# Altium PCB WorldClock.PcbDoc (part 1 of 13)
Units mil, origin at the board's own origin, x right, y up, seen from the top; angles counter-clockwise.
Board outline 3700 x 3850 mil, 2 copper layers (Top Layer, Bottom Layer); 227 components, 134 nets, 1324 pads, 248 vias.
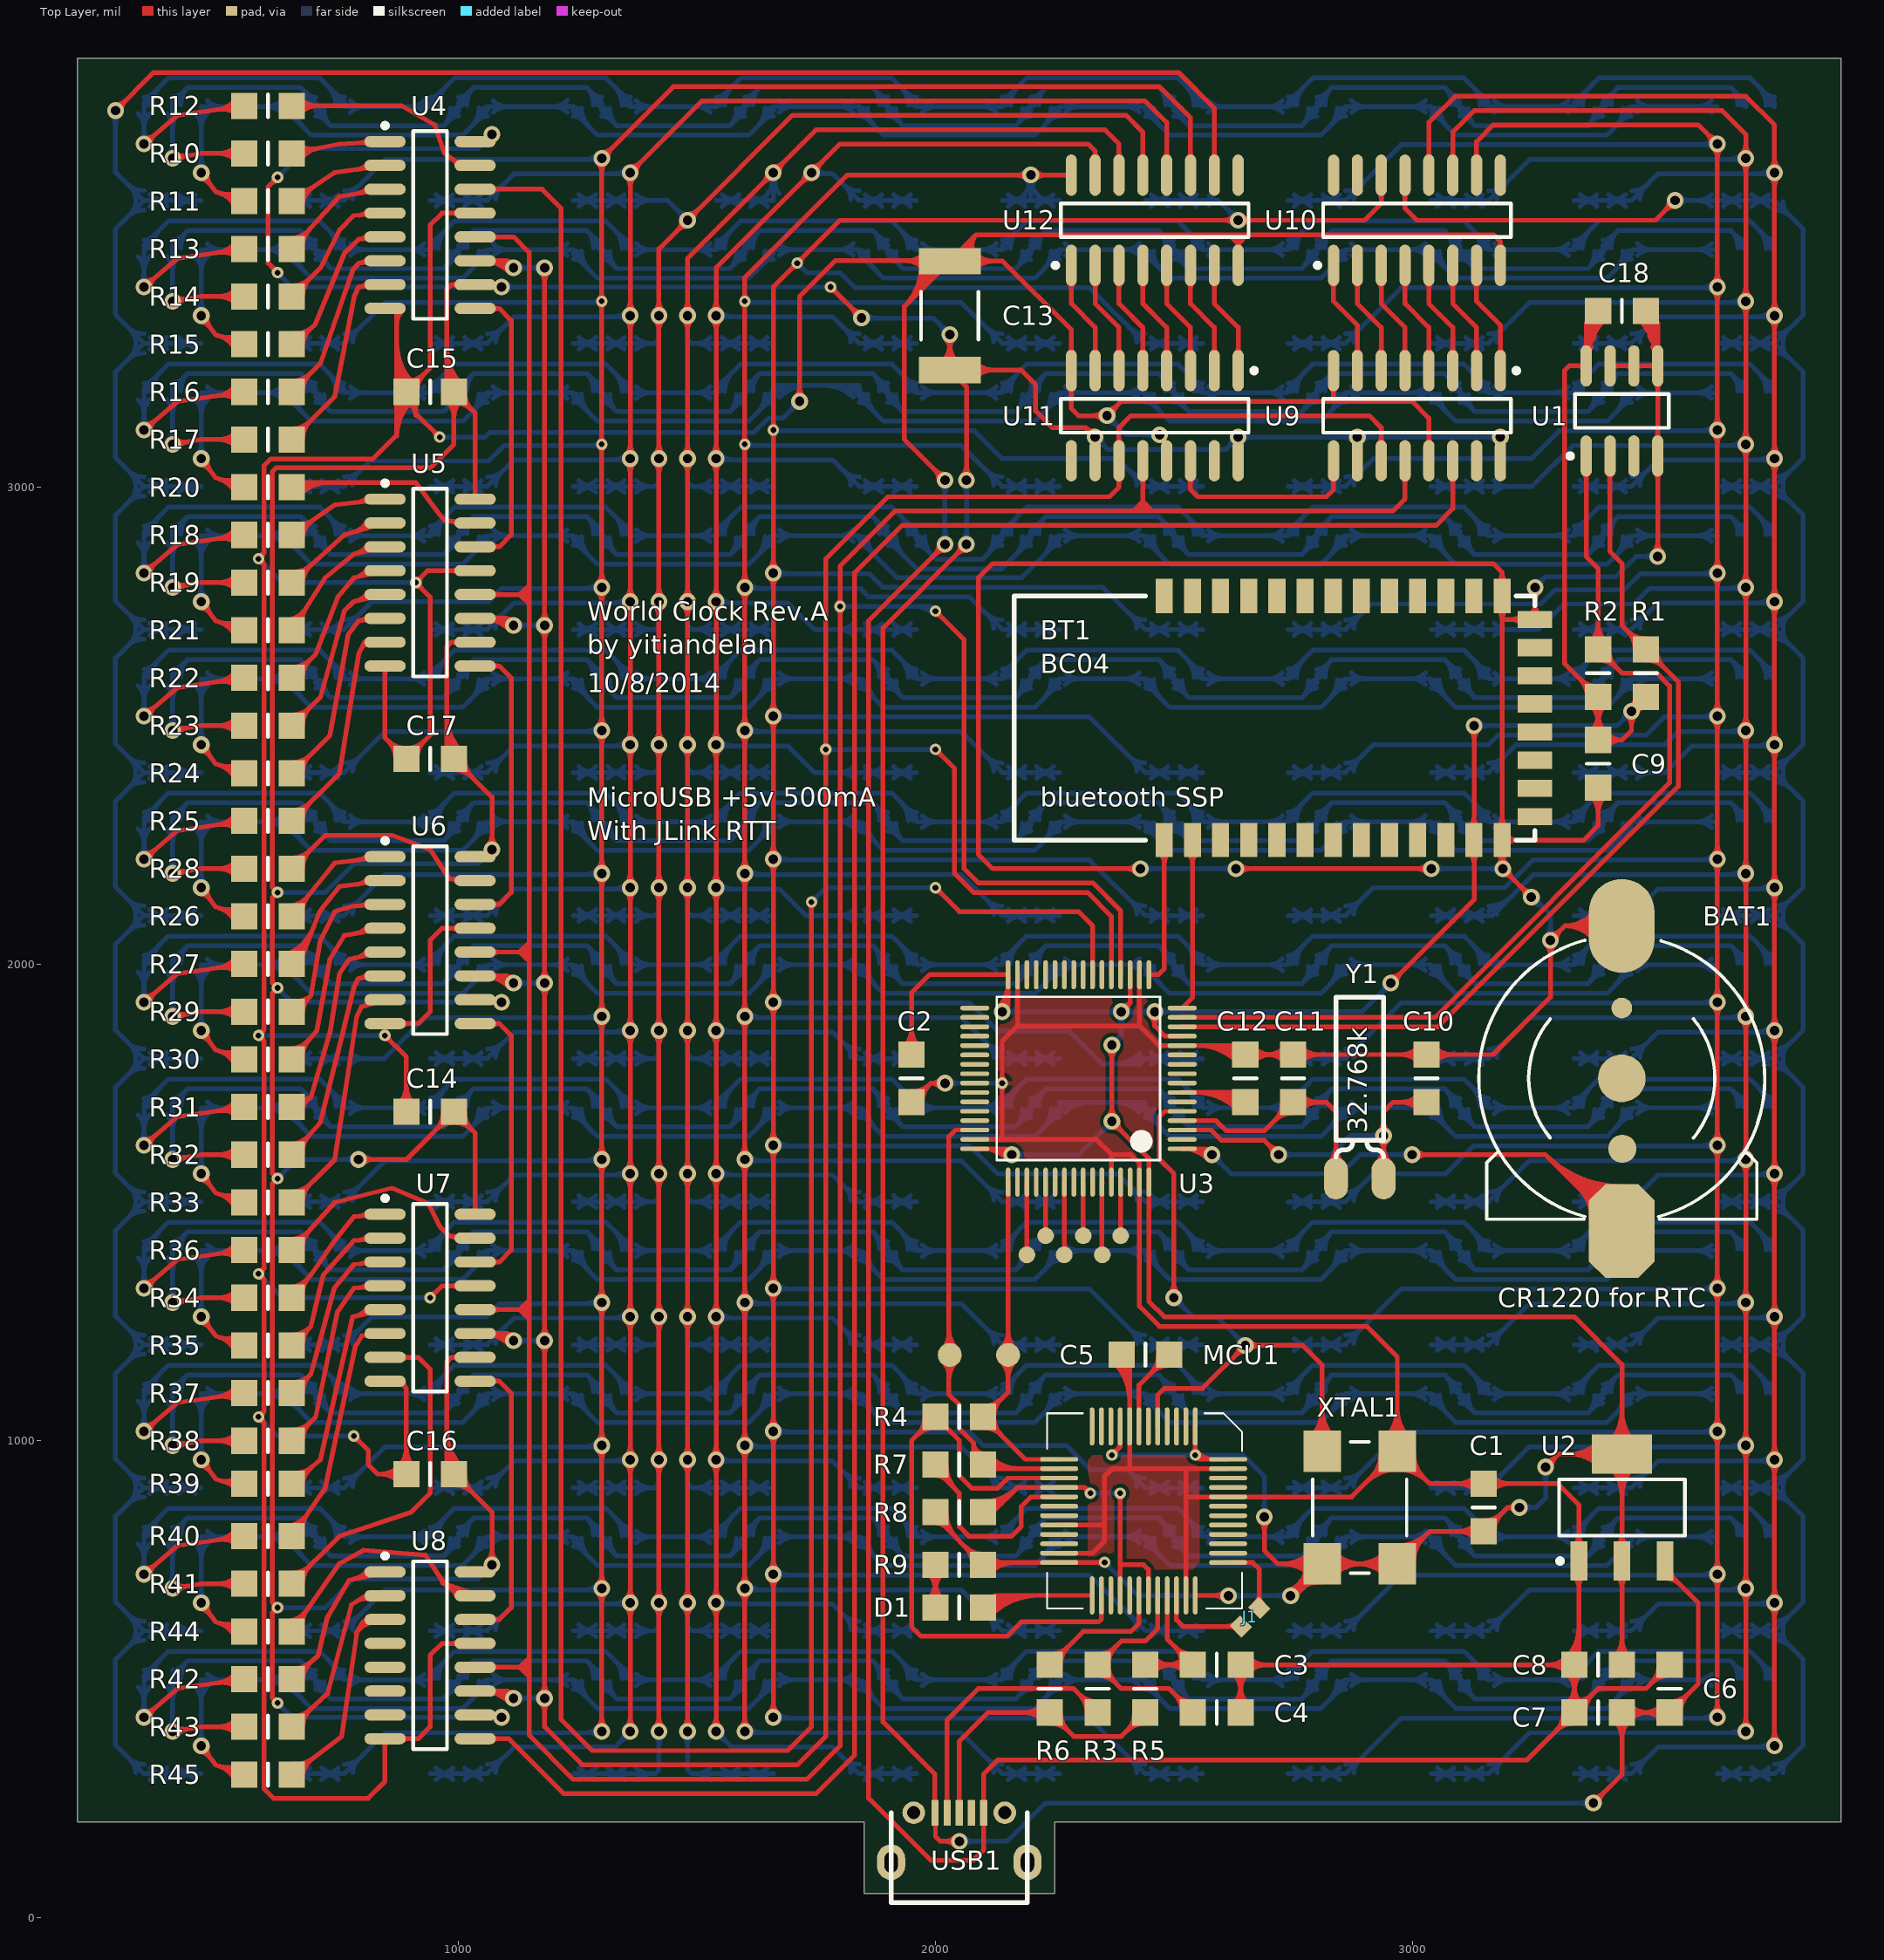
[diagram p0: Top Layer view]
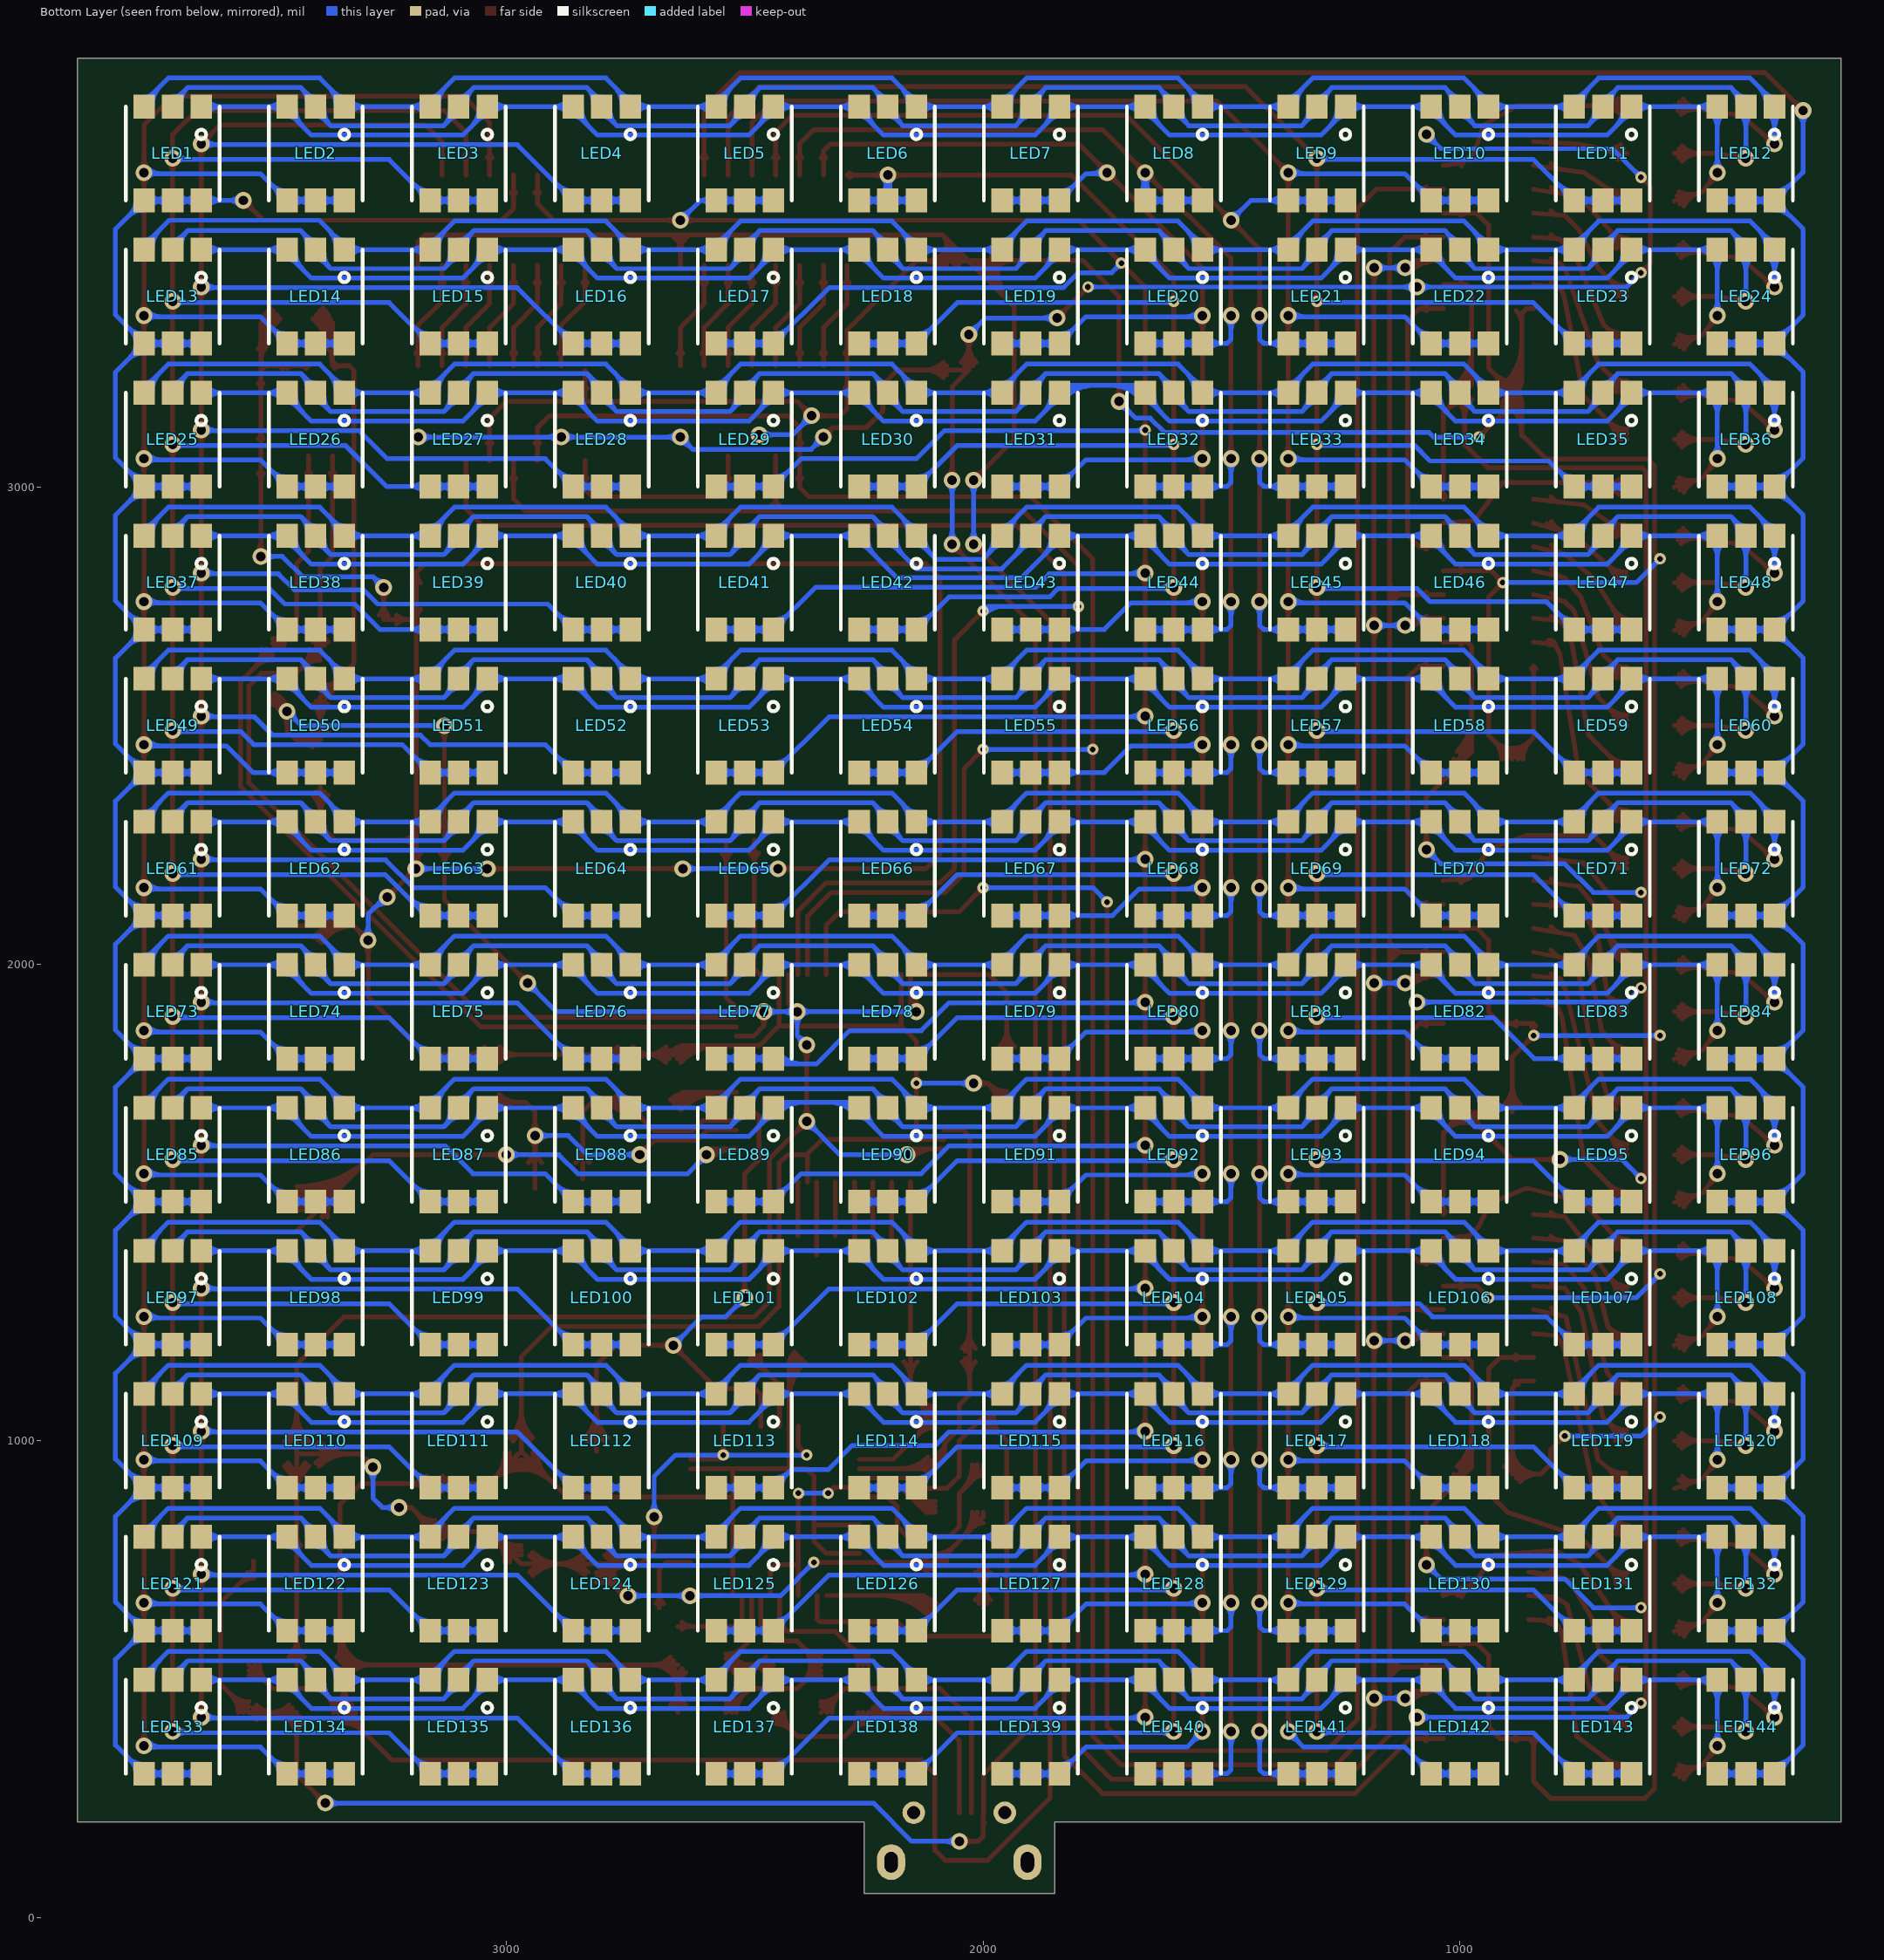
[diagram p1: Bottom Layer view, seen from below]

## Layer stack, top to bottom
Top Solder: solder mask 0.4, Solder Resist, Dk 3.5
Top Layer: signal copper 1.4
Dielectric 1: dielectric 12.6, FR-4, Dk 4.8
Bottom Layer: signal copper 1.4
Bottom Solder: solder mask 0.4, Solder Resist, Dk 3.5

## Board outline
200,200 1850,200 1850,50 2250,50 2250,200 3900,200 3900,3900 200,3900

## Design rules (kind name [scope] priority, off if disabled: settings)
Clearance [All] p1: gap=8
PolygonConnect [All] p1: connectstyle=Relief reliefconductorwidth=10 reliefentries=4 polygonreliefangle="90 Angle" airgapwidth=10
RoutingVias [All] p1: holewidth=28 width=50 viastyle="Through Hole" minholewidth=28 minwidth=50 maxholewidth=28 maxwidth=50
SolderMaskExpansion [All] p1: expansion=4
Width [All] p1: maxlimit=20 minlimit=10 preferedwidth=10 minimp=50.000000 maximp=50.000000 favimp=50.000000
29 further rules are at their usual default settings.

## Classes and differential pairs
component class 单片机: BAT1 BT1 XTAL1
component class 仿真器: SWD USB1

## Components (designator, comment, footprint, x,y, rotation, side; value= is the part's Value field where it differs from the comment)
BAT1 "CR1220" BAT-CR1220 3440,1440 r0 top
BT1 "BC04" BC04 2480,2260 r90 top
C1 "100nF" 0805 3150,860 r270 top
C2 "100nF" 0805 1950,1760 r90 top
C3 "22pF" 0805 2590,530 r180 top
C4 "22pF" 0805 2590,430 r180 top
C5 "100nF" 0805 2440.28,1180.37 r180 top
C6 "10uF" 0805 3540,480 r90 top
C7 "100nF" 0805 3390,430 r0 top
C8 "10uF" 0805 3390,530 r180 top
C9 "100nF" 0805 3390,2420 r90 top
C10 "10pF" 0805 3030,1760 r270 top
C11 "10pF" 0805 2750,1760 r270 top
C12 "100nF" 0805 2650,1760 r90 top
C13 "100uF" 2512 2030,3360 r90 top
C14 "10uF" 0805 940,1690 r180 top
C15 "10uF" 0805 940,3200 r180 top
C16 "10uF" 0805 940,930 r180 top
C17 "10uF" 0805 940,2430 r180 top
C18 "100nF" 0805 3440,3370 r180 top
D1 "LED0" 0805 2050,650 r0 top
J1 "CON2" 0603 2660,630 r225 top
LED1 "RGBLED" 5050 3700,3700 r270 bottom
LED2 "RGBLED" 5050 3400,3700 r270 bottom
LED3 "RGBLED" 5050 3100,3700 r270 bottom
LED4 "RGBLED" 5050 2800,3700 r270 bottom
LED5 "RGBLED" 5050 2500,3700 r270 bottom
LED6 "RGBLED" 5050 2200,3700 r270 bottom
LED7 "RGBLED" 5050 1900,3700 r270 bottom
LED8 "RGBLED" 5050 1600,3700 r270 bottom
LED9 "RGBLED" 5050 1300,3700 r270 bottom
LED10 "RGBLED" 5050 1000,3700 r270 bottom
LED11 "RGBLED" 5050 700,3700 r270 bottom
LED12 "RGBLED" 5050 400,3700 r270 bottom
LED13 "RGBLED" 5050 3700,3400 r270 bottom
LED14 "RGBLED" 5050 3400,3400 r270 bottom
LED15 "RGBLED" 5050 3100,3400 r270 bottom
LED16 "RGBLED" 5050 2800,3400 r270 bottom
LED17 "RGBLED" 5050 2500,3400 r270 bottom
LED18 "RGBLED" 5050 2200,3400 r270 bottom
LED19 "RGBLED" 5050 1900,3400 r270 bottom
LED20 "RGBLED" 5050 1600,3400 r270 bottom
LED21 "RGBLED" 5050 1300,3400 r270 bottom
LED22 "RGBLED" 5050 1000,3400 r270 bottom
LED23 "RGBLED" 5050 700,3400 r270 bottom
LED24 "RGBLED" 5050 400,3400 r270 bottom
LED25 "RGBLED" 5050 3700,3100 r270 bottom
LED26 "RGBLED" 5050 3400,3100 r270 bottom
LED27 "RGBLED" 5050 3100,3100 r270 bottom
LED28 "RGBLED" 5050 2800,3100 r270 bottom
LED29 "RGBLED" 5050 2500,3100 r270 bottom
LED30 "RGBLED" 5050 2200,3100 r270 bottom
LED31 "RGBLED" 5050 1900,3100 r270 bottom
LED32 "RGBLED" 5050 1600,3100 r270 bottom
LED33 "RGBLED" 5050 1300,3100 r270 bottom
LED34 "RGBLED" 5050 1000,3100 r270 bottom
LED35 "RGBLED" 5050 700,3100 r270 bottom
LED36 "RGBLED" 5050 400,3100 r270 bottom
LED37 "RGBLED" 5050 3700,2800 r270 bottom
LED38 "RGBLED" 5050 3400,2800 r270 bottom
LED39 "RGBLED" 5050 3100,2800 r270 bottom
LED40 "RGBLED" 5050 2800,2800 r270 bottom
LED41 "RGBLED" 5050 2500,2800 r270 bottom
LED42 "RGBLED" 5050 2200,2800 r270 bottom
LED43 "RGBLED" 5050 1900,2800 r270 bottom
LED44 "RGBLED" 5050 1600,2800 r270 bottom
LED45 "RGBLED" 5050 1300,2800 r270 bottom
LED46 "RGBLED" 5050 1000,2800 r270 bottom
LED47 "RGBLED" 5050 700,2800 r270 bottom
LED48 "RGBLED" 5050 400,2800 r270 bottom
LED49 "RGBLED" 5050 3700,2500 r270 bottom
LED50 "RGBLED" 5050 3400,2500 r270 bottom
LED51 "RGBLED" 5050 3100,2500 r270 bottom
LED52 "RGBLED" 5050 2800,2500 r270 bottom
LED53 "RGBLED" 5050 2500,2500 r270 bottom
LED54 "RGBLED" 5050 2200,2500 r270 bottom
LED55 "RGBLED" 5050 1900,2500 r270 bottom
LED56 "RGBLED" 5050 1600,2500 r270 bottom
LED57 "RGBLED" 5050 1300,2500 r270 bottom
LED58 "RGBLED" 5050 1000,2500 r270 bottom
LED59 "RGBLED" 5050 700,2500 r270 bottom
LED60 "RGBLED" 5050 400,2500 r270 bottom
LED61 "RGBLED" 5050 3700,2200 r270 bottom
LED62 "RGBLED" 5050 3400,2200 r270 bottom
LED63 "RGBLED" 5050 3100,2200 r270 bottom
LED64 "RGBLED" 5050 2800,2200 r270 bottom
LED65 "RGBLED" 5050 2500,2200 r270 bottom
LED66 "RGBLED" 5050 2200,2200 r270 bottom
LED67 "RGBLED" 5050 1900,2200 r270 bottom
LED68 "RGBLED" 5050 1600,2200 r270 bottom
LED69 "RGBLED" 5050 1300,2200 r270 bottom
LED70 "RGBLED" 5050 1000,2200 r270 bottom
LED71 "RGBLED" 5050 700,2200 r270 bottom
LED72 "RGBLED" 5050 400,2200 r270 bottom
LED73 "RGBLED" 5050 3700,1900 r270 bottom
LED74 "RGBLED" 5050 3400,1900 r270 bottom
LED75 "RGBLED" 5050 3100,1900 r270 bottom
LED76 "RGBLED" 5050 2800,1900 r270 bottom
LED77 "RGBLED" 5050 2500,1900 r270 bottom
LED78 "RGBLED" 5050 2200,1900 r270 bottom
LED79 "RGBLED" 5050 1900,1900 r270 bottom
LED80 "RGBLED" 5050 1600,1900 r270 bottom
LED81 "RGBLED" 5050 1300,1900 r270 bottom
LED82 "RGBLED" 5050 1000,1900 r270 bottom
LED83 "RGBLED" 5050 700,1900 r270 bottom
LED84 "RGBLED" 5050 400,1900 r270 bottom
LED85 "RGBLED" 5050 3700,1600 r270 bottom
LED86 "RGBLED" 5050 3400,1600 r270 bottom
LED87 "RGBLED" 5050 3100,1600 r270 bottom
LED88 "RGBLED" 5050 2800,1600 r270 bottom
LED89 "RGBLED" 5050 2500,1600 r270 bottom
LED90 "RGBLED" 5050 2200,1600 r270 bottom
LED91 "RGBLED" 5050 1900,1600 r270 bottom
LED92 "RGBLED" 5050 1600,1600 r270 bottom
LED93 "RGBLED" 5050 1300,1600 r270 bottom
LED94 "RGBLED" 5050 1000,1600 r270 bottom
LED95 "RGBLED" 5050 700,1600 r270 bottom
LED96 "RGBLED" 5050 400,1600 r270 bottom
LED97 "RGBLED" 5050 3700,1300 r270 bottom
LED98 "RGBLED" 5050 3400,1300 r270 bottom
LED99 "RGBLED" 5050 3100,1300 r270 bottom
LED100 "RGBLED" 5050 2800,1300 r270 bottom
LED101 "RGBLED" 5050 2500,1300 r270 bottom
LED102 "RGBLED" 5050 2200,1300 r270 bottom
LED103 "RGBLED" 5050 1900,1300 r270 bottom
LED104 "RGBLED" 5050 1600,1300 r270 bottom
LED105 "RGBLED" 5050 1300,1300 r270 bottom
LED106 "RGBLED" 5050 1000,1300 r270 bottom
LED107 "RGBLED" 5050 700,1300 r270 bottom
LED108 "RGBLED" 5050 400,1300 r270 bottom
LED109 "RGBLED" 5050 3700,1000 r270 bottom
LED110 "RGBLED" 5050 3400,1000 r270 bottom
LED111 "RGBLED" 5050 3100,1000 r270 bottom
LED112 "RGBLED" 5050 2800,1000 r270 bottom
LED113 "RGBLED" 5050 2500,1000 r270 bottom
LED114 "RGBLED" 5050 2200,1000 r270 bottom
LED115 "RGBLED" 5050 1900,1000 r270 bottom
LED116 "RGBLED" 5050 1600,1000 r270 bottom
LED117 "RGBLED" 5050 1300,1000 r270 bottom
LED118 "RGBLED" 5050 1000,1000 r270 bottom
LED119 "RGBLED" 5050 700,1000 r270 bottom
LED120 "RGBLED" 5050 400,1000 r270 bottom
LED121 "RGBLED" 5050 3700,700 r270 bottom
LED122 "RGBLED" 5050 3400,700 r270 bottom
LED123 "RGBLED" 5050 3100,700 r270 bottom
LED124 "RGBLED" 5050 2800,700 r270 bottom
LED125 "RGBLED" 5050 2500,700 r270 bottom
LED126 "RGBLED" 5050 2200,700 r270 bottom
LED127 "RGBLED" 5050 1900,700 r270 bottom
LED128 "RGBLED" 5050 1600,700 r270 bottom
LED129 "RGBLED" 5050 1300,700 r270 bottom
LED130 "RGBLED" 5050 1000,700 r270 bottom
LED131 "RGBLED" 5050 700,700 r270 bottom
LED132 "RGBLED" 5050 400,700 r270 bottom
LED133 "RGBLED" 5050 3700,400 r270 bottom
LED134 "RGBLED" 5050 3400,400 r270 bottom
LED135 "RGBLED" 5050 3100,400 r270 bottom
LED136 "RGBLED" 5050 2800,400 r270 bottom
LED137 "RGBLED" 5050 2500,400 r270 bottom
LED138 "RGBLED" 5050 2200,400 r270 bottom
LED139 "RGBLED" 5050 1900,400 r270 bottom
LED140 "RGBLED" 5050 1600,400 r270 bottom
LED141 "RGBLED" 5050 1300,400 r270 bottom
LED142 "RGBLED" 5050 1000,400 r270 bottom
LED143 "RGBLED" 5050 700,400 r270 bottom
LED144 "RGBLED" 5050 400,400 r270 bottom
MCU1 "STM32F103C8T6" LQLFP48 2230,1060 r270 top
R1 "10k" 0805 3490,2610 r90 top
R2 "10k" 0805 3390,2610 r90 top
R3 "22" 0805 2340,480 r90 top
R4 "100" 0805 2050,1050.23 r180 top
R5 "22" 0805 2440,480 r90 top
R6 "1.5K" 0805 2240,480 r90 top
R7 "100" 0805 2050,950 r180 top
R8 "10k" 0805 2050,850 r180 top
R9 "1k" 0805 2050,740 r0 top
R10 "120" 0805 600,3700 r0 top
R11 "120" 0805 600,3600 r0 top
R12 "120" 0805 600,3800 r180 top
R13 "120" 0805 600,3500 r0 top
R14 "120" 0805 600,3400 r0 top
R15 "120" 0805 600,3300 r0 top
R16 "120" 0805 600,3200 r0 top
R17 "120" 0805 600,3100 r0 top
R18 "120" 0805 600,2900 r0 top
R19 "120" 0805 600,2800 r0 top
R20 "120" 0805 600,3000 r180 top
R21 "120" 0805 600,2700 r0 top
R22 "120" 0805 600,2600 r0 top
R23 "120" 0805 600,2500 r0 top
R24 "120" 0805 600,2400 r0 top
R25 "120" 0805 600,2300 r0 top
R26 "120" 0805 600,2100 r0 top
R27 "120" 0805 600,2000 r0 top
R28 "120" 0805 600,2200 r180 top
R29 "120" 0805 600,1900 r0 top
R30 "120" 0805 600,1800 r0 top
R31 "120" 0805 600,1700 r0 top
R32 "120" 0805 600,1600 r0 top
R33 "120" 0805 600,1500 r0 top
R34 "120" 0805 600,1300 r0 top
R35 "120" 0805 600,1200 r0 top
R36 "120" 0805 600,1400 r180 top
R37 "120" 0805 600,1100 r0 top
R38 "120" 0805 600,1000 r0 top
R39 "120" 0805 600,910 r0 top
R40 "120" 0805 600,800 r0 top
R41 "120" 0805 600,700 r0 top
R42 "120" 0805 600,500 r0 top
R43 "120" 0805 600,400 r0 top
R44 "120" 0805 600,600 r180 top
R45 "120" 0805 600,300 r0 top
U1 "LM75" SO8_N 3440,3160 r90 top
U2 "LM1117" SOT223_L 3440,860 r90 top
U3 "STM32F103RBT6" LQFP-64 2470,1590 r180 top
U4 "74HC595" SO-16_N 940,3550 r0 top
U5 "74HC595" SO-16_N 940,2800 r0 top
U6 "74HC595" SO-16_N 940,2050 r0 top
U7 "74HC595" SO-16_N 940,1300 r0 top
U8 "74HC595" SO-16_N 940,550 r0 top
U9 "74HC595" SO-16_N 3010,3150 r270 top
U10 "ULN2003" SO-16_N 3010,3560 r90 top
U11 "74HC595" SO-16_N 2460,3150 r270 top
U12 "ULN2003" SO-16_N 2460,3560 r90 top
USB1 "USB_mini" USB-MICRO 2050,220 r180 top
XTAL1 "XTAL" XTAL7050 2890,860 r90 top
Y1 "XTAL" XTAL-32768 2840,1550 r0 top

## Footprints (in the part's own frame and the unit in brackets; to place one, negate y for a bottom-side part, rotate by r counter-clockwise, add the part's x,y. Pads: shape width x height; smd on the part's side, far side on the other; paste and mask are expansions set on the pad)
0603 [mm] "Chip Capacitor, Body 1.6x0.8mm, IPC High Density"
  rect 0.8x0.9 smd: 1(-0.7,0) 2(0.7,0)
  body extent -0.87,-0.47 0.87,0.47, height 1.3
0805 [mil] "Chip Resistor, Body 2.0x1.2mm, IPC Medium Density"
  rect 55x55 smd: 1(-50,0) 2(50,0)
  Top Layer pour cut-out: -20,30 20,30 20,-30 -20,-30
  silkscreen extent 0,-24 0,24, body extent -40,-28 40,28, height 28
2512 [mm] "Chip Capacitor, Body 2.54x1.27mm, IPC High Density"
  rect 1.4x3.3 smd: 1(-2.9,0) 2(2.9,0)
  silkscreen extent -1.27,-1.52 1.27,1.52, body extent -3.05,-1.7 3.05,1.7, height 1.4
5050 [mil]
  rect 50x45 smd: 1(-98.43,60) 2(-98.43,0) 3(-98.43,-60) 4(98.43,-60) 5(98.43,0) 6(98.43,60)
  silkscreen extent -98,-98 98,98, body extent -100,-100 100,100, height 47
BAT-CR1220 [mm]
  round 2.54 smd: 0(-0.01,8.13)
  round 1.1 smd: 0(-0.01,11.88)
  round 1.5 smd: 0(0.015,4.38)
  oct 3.5x5 smd: 1(-0.01,0.002)
  oval 3.5x5 smd: 2(-0.01,16.258)
  silkscreen extent -7.63,0.63 7.61,15.49
BC04 [mil]
  rect 72x36 smd: 1(0,0) 2(0,-59.06) 3(0,-118.11) 4(0,-177.17) 5(0,-236.22) 6(0,-295.28) 7(0,-354.33) 8(0,-413.39) 9(0,-472.44) 10(0,-531.5) 11(0,-590.55) 12(0,-649.61) 13(0,-708.66) 22(511.81,-708.66) 23(511.81,-649.61) 24(511.81,-590.55) 25(511.81,-531.5) 26(511.81,-472.44) 27(511.81,-413.39) 28(511.81,-354.33) 29(511.81,-295.28) 30(511.81,-236.22) 31(511.81,-177.17) 32(511.81,-118.11) 33(511.81,-59.06) 34(511.81,0)
  rect 36x72 smd: 14(49.21,-777.56) 15(108.27,-777.56) 16(167.32,-777.56) 17(226.38,-777.56) 18(285.43,-777.56) 19(344.49,-777.56) 20(403.54,-777.56) 21(462.6,-777.56)
  silkscreen extent 0,-778 512,315
LQFP-64 [mm]
  oval 1.55x0.25 smd: 1(-1.207,-0.568) 2(-1.207,-1.068) 3(-1.207,-1.568) 4(-1.207,-2.068) 5(-1.207,-2.568) 6(-1.207,-3.068) 7(-1.207,-3.568) 8(-1.207,-4.068) 9(-1.207,-4.568) 10(-1.207,-5.068) 11(-1.207,-5.568) 12(-1.207,-6.068) 13(-1.207,-6.568) 14(-1.207,-7.068) 15(-1.207,-7.568) 16(-1.207,-8.068) 33(9.843,-8.068) 34(9.843,-7.568) 35(9.843,-7.068) 36(9.843,-6.568) 37(9.843,-6.068) 38(9.843,-5.568) 39(9.843,-5.068) 40(9.843,-4.568) 41(9.843,-4.068) 42(9.843,-3.568) 43(9.843,-3.068) 44(9.843,-2.568) 45(9.843,-2.068) 46(9.843,-1.568) 47(9.843,-1.068) 48(9.843,-0.568)
  oval 0.25x1.55 smd: 17(0.568,-9.843) 18(1.068,-9.843) 19(1.568,-9.843) 20(2.068,-9.843) 21(2.568,-9.843) 22(3.068,-9.843) 23(3.568,-9.843) 24(4.068,-9.843) 25(4.568,-9.843) 26(5.068,-9.843) 27(5.568,-9.843) 28(6.068,-9.843) 29(6.568,-9.843) 30(7.068,-9.843) 31(7.568,-9.843) 32(8.068,-9.843) 49(8.068,1.207) 50(7.568,1.207) 51(7.068,1.207) 52(6.568,1.207) 53(6.068,1.207) 54(5.568,1.207) 55(5.068,1.207) 56(4.568,1.207) 57(4.068,1.207) 58(3.568,1.207) 59(3.068,1.207) 60(2.568,1.207) 61(2.068,1.207) 62(1.568,1.207) 63(1.068,1.207) 64(0.568,1.207)
  silkscreen extent -0.03,-8.67 8.67,0.03, body extent -0.68,-9.32 9.32,0.68, height 1.6
LQLFP48 [mil] "STC"
  oval 80x10 smd: 1(30,315) 2(30,295.31) 3(30,275.63) 4(30,255.94) 5(30,236.26) 6(30,216.57) 7(30,196.89) 8(30,177.2) 9(30,157.52) 10(30,137.83) 11(30,118.15) 12(30,98.46) 25(384.33,98.46) 26(384.33,118.15) 27(384.33,137.83) 28(384.33,157.52) 29(384.33,177.2) 30(384.33,196.89) 31(384.33,216.57) 32(384.33,236.26) 33(384.33,255.94) 34(384.33,275.63) 35(384.33,295.31) 36(384.33,315)
  oval 10x80 smd: 13(98.9,29.57) 14(118.58,29.57) 15(138.27,29.57) 16(157.95,29.57) 17(177.64,29.57) 18(197.32,29.57) 19(217.01,29.57) 20(236.69,29.57) 21(256.38,29.57) 22(276.06,29.57) 23(295.75,29.57) 24(315.43,29.57) 37(315.43,383.9) 38(295.75,383.9) 39(276.06,383.9) 40(256.38,383.9) 41(236.69,383.9) 42(217.01,383.9) 43(197.32,383.9) 44(177.64,383.9) 45(157.95,383.9) 46(138.27,383.9) 47(118.58,383.9) 48(98.9,383.9)
  silkscreen extent 2,4 412,413, body extent 58,57 358,357, height 60
SO8_N [mm] "SOIC, 8-Leads, Body 4.9x3.9mm, Pitch 1.27mm, IPC Medium Density"
  oval 2.2x0.6 smd: 1(-2.4,1.905) 2(-2.4,0.635) 3(-2.4,-0.635) 4(-2.4,-1.905) 5(2.4,-1.905) 6(2.4,-0.635) 7(2.4,0.635) 8(2.4,1.905)
  silkscreen extent -2.52,-2.5 0.9,2.88, body extent -2,-2.5 2,2.5, height 1.75
SO-16_N [mm] "SOIC, 16-Leads, Body 9.9x3.9mm, Pitch 1.27mm, IPC Medium Density"
  oval 2.2x0.6 smd: 1(-2.4,4.445) 2(-2.4,3.175) 3(-2.4,1.905) 4(-2.4,0.635) 5(-2.4,-0.635) 6(-2.4,-1.905) 7(-2.4,-3.175) 8(-2.4,-4.445) 9(2.4,-4.445) 10(2.4,-3.175) 11(2.4,-1.905) 12(2.4,-0.635) 13(2.4,0.635) 14(2.4,1.905) 15(2.4,3.175) 16(2.4,4.445)
  silkscreen extent -2.52,-5 0.9,5.42, body extent -2,-5 2,5, height 1.75
SOT223_L [mm] "SOT223, 4-Leads, Body 6.5x3.5mm, Pitch 2.3mm, Lead Span 7mm, IPC High Density"
  rect 2.1x0.9 smd: 1(-2.85,2.3) 2(-2.85,0) 3(-2.85,-2.3)
  rect 2.1x3.2 smd: 4(2.85,0)
  silkscreen extent -2.97,-3.35 1.5,3.42, body extent -1.85,-3.35 1.85,3.35, height 1.7
USB-MICRO [mil]
  rect 15x54 smd: 1(51,0) 2(25.5,0) 3(0,0) 4(-25.5,0) 5(-51,0)
  oval 59.06x74.8 hole 27.56 slot 43.31 at 90 deg: 6(-143,104) 6(143,104)
  round 47.24 hole 27.5: 6(-95.5,0) 6(95.5,0)
  silkscreen extent -143,0 143,189
XTAL7050 [mm]
  rect 2.2x2 smd: 1(-3,-2) 2(3,-2) 3(3,2) 4(-3,2)
  silkscreen extent -3.5,-2.5 3.5,2.5
XTAL-32768 [mil]
  oval 50x88 smd: 1(0,0) 2(100,0)
  silkscreen extent 0,45 100,380, body extent -18,-28 118,396, height 126

## Part data
BAT1: library part Battery, "Multicell Battery"
C1 C2 C3 C4 C5 C6 C7 C8 C9 C10 C11 C12 C13 C14 C15 C16 C17 C18: library part Cap, "Capacitor"
D1: "Typical INFRARED GaAs LED"
J1 USB1: "Connector"
MCU1: "STM32 ARM-based 32-bit MCU Performance Line with 64 kB Flash, 20 kB Internal RAM, -40 to +85癈 Temperature, 48-Pin LQFP, Tray"
R1 R2 R3 R4 R5 R6 R7 R8 R9 R10 R11 R12 R13 R14 R15 R16 R17 R18 R19 R20 R21 R22 R23 R24 R25 R26 R27 R28 R29 R30 R31 R32 R33 R34 R35 R36 R37 R38 R39 R40 R41 R42 R43 R44 R45: library part Res2, "Resistor"
U2: "正三端稳压器"
U3: "STM32 ARM-based 32-bit MCU Performance Line with 128 kB Flash, 20 kB Internal RAM, -40 to +85癈 Temperature, 64-Pin LQFP, Tray"
XTAL1: library part XTAL_SMD
Y1: "Crystal Oscillator"

## Free pads (board coordinates)
  round 50 smd: 0(2030,1180) 0(2152.36,1180)
  round 35 smd: 0(2191.73,1390) 0(2231.1,1430) 0(2270,1390) 0(2310,1430) 0(2350,1390) 0(2388.58,1430)

## Via types
v1: diameter 35, hole 20, Top Layer to Bottom Layer, tented both sides, 213 vias
v2: diameter 24, hole 12, Top Layer to Bottom Layer, tented both sides, 35 vias

## Nets (pads, with @x,y where several pads share a name; then routed paths per layer and width w, separated by ;. In a path a pad name is that pad's centre, name@x,y a point inside that pad or via, vN(x,y) a via of type N, cw(c..) or ccw(c..) an arc to the next point about the centre after c; other vN are vias at no path point)
3V3: BT1.12 C1.2 C2.2 C8.1 C9.2 C18.2 MCU1.1 MCU1.9 MCU1.24 MCU1.36 MCU1.48 R1.1 R2.1 R8.2 R9.2 U1.8 U2.2 U2.4 U3.13 U3.19 U3.32 U3.48 U3.64 XTAL1.1 XTAL1.4 | length 14947.2
  Top Layer w10: C2.2@1934.09,1825.91 ccw(c1895.68,1864.32) 1950,1864.32 ccw(c2004.32,1864.32) C2.2@1965.91,1825.91 ; C2.2@1941.16,1818.84 ccw(c1919.82,1840.18) 1950,1840.18 ccw(c1980.18,1840.18) C2.2@1958.84,1818.84 ; C2.2@1950,1810 1950,1940 1987.52,1977.52 U3.32@2152.36,1977.52 2152.36,1912.36 v1(2140,1900) ; R8.2@2000,827.5 cw(c2000,797.32) 2021.34,818.66 ; R8.2@2000,850 2000,840 R9.2@2100,740 2104.57,744.57 MCU1.24@2259.57,744.57 2354.57,744.57 v2(2355,745) ; R8.2@2012.5,850 ccw(c2066.82,850) 2028.41,811.59 ; R8.2@2022.5,850 ccw(c2100.96,850) 2045.48,794.52 ; R9.2@2077.5,740 ccw(c2023.18,740) 2061.59,778.41 ccw(c2100,816.82) R9.2@2100,762.5 ; U3.48@2082.48,1612.36 2147.64,1612.36 v1(2160,1600) ; R9.2@2087.5,740 ccw(c2057.32,740) 2078.66,761.34 ccw(c2100,782.68) R9.2@2100,752.5 ; U3.48@2099.98,1612.36 cw(c2099.98,1539.98) v1@2151.16,1591.16 ; R9.2@2108.84,731.16 cw(c2141.2,698.8) 2141.2,744.57 ; R9.2@2115.91,724.09 cw(c2165.35,674.65) 2165.35,744.57 ; R9.2@2115.91,755.91 ccw(c2143.29,783.29) 2143.29,744.57 ; 2124.12,1612.36 cw(c2124.12,1564.12) v1@2158.23,1598.23 ; v1@2131.16,1908.84 ccw(c2079.98,1960.02) U3.32@2152.36,1960.02 ; v1@2138.23,1901.77 ccw(c2104.12,1935.88) 2152.36,1935.88 ; 2337.05,744.57 ccw(c2337.05,762.95) v2@2350.05,749.95 ; 2339.15,744.57 cw(c2339.15,729.15) v2@2350.05,740.05 ; v1@2361.16,1678.84 ccw(c2339.82,1700.18) 2370,1700.18 ccw(c2400.18,1700.18) v1@2378.84,1678.84 ; v1@2361.16,1821.16 cw(c2339.82,1799.82) 2370,1799.82 cw(c2400.18,1799.82) v1@2378.84,1821.16 ; v2(2370,970) 2387.52,987.52 MCU1.9@2387.52,1030 ; v2@2370,977 ccw(c2370,993.9) 2381.95,981.95 ccw(c2393.9,970) v2@2377,970 ; v1@2370,1657.5 cw(c2370,1627.32) 2391.34,1648.66 cw(c2412.68,1670) v1@2382.5,1670 ; v1(2370,1830) v1(2370,1670) 2447.64,1592.36 U3.64@2447.64,1542.48 2447.64,1292.36 2480,1260 3340,1260 3440,1160 U2.4@3440,972.2 ; 2382.23,982.23 ccw(c2369.46,995) MCU1.9@2387.52,995 ; v1(2390,1900) 2408.27,1918.27 ; v1@2391.45,1912.42 ccw(c2393.81,1932.72) 2408.27,1918.27 ; v1@2402.42,1901.45 cw(c2422.72,1903.81) 2408.27,1918.27 ; U3.19@2408.27,1977.52 2408.27,1918.27 ; v1@2451.2,1891.12 cw(c2430.25,1870) 2460,1870 ; v1(2460,1900) 2460,1870 ; v1@2468.8,1891.12 ccw(c2489.75,1870) 2460,1870 ; U3.13@2517.52,1848.58 2481.42,1848.58 2460,1870 ; v2@2540.05,974.95 ccw(c2528.1,986.9) 2545,986.9 ccw(c2561.9,986.9) 2549.95,974.95 ccw(c2583.38,1008.38) MCU1.48@2583.38,961.1 ; v2@2542.88,967.88 ccw(c2559.24,984.24) 2559.24,961.1 ; MCU1.36@2545,675.67 2614.33,675.67 v1(2615,675) ; MCU1.1@2545,1030 v2(2545,970) 2553.9,961.1 ; v2@2546.6,963.18 cw(c2548.38,955.58) 2553.9,961.1 ; v2@2551.82,968.4 ccw(c2559.42,966.62) 2553.9,961.1 ; 2583.21,675.67 cw(c2583.21,643.21) v1@2606.16,666.16 ; 2586.44,675.67 ccw(c2586.44,703.56) v1@2606.16,683.84 ; MCU1.48@2613.9,961.1 2553.9,961.1 ; v1@2681.16,831.16 cw(c2659.82,809.82) 2690,809.82 cw(c2720.18,809.82) v1@2698.84,831.16 ; v1(2690,840) 2690,770 2718.11,741.89 XTAL1.4@2811.26,741.89 ; v1@2741.76,687.07 ccw(c2730.88,727.7) 2767.3,706.67 ; v1(2745,675) 2745,675.63 XTAL1.4@2811.26,741.89 ; v1@2745,687.5 ccw(c2745,716.16) 2765.26,695.89 ; v1@2745.87,676.5 cw(c2811.26,611.1) XTAL1.4@2811.26,703.58 ; v1@2748.24,687.07 ccw(c2755.28,713.38) 2768.9,689.79 ; v1@2755.37,686 ccw(c2703.42,737.95) XTAL1.4@2776.89,737.95 ; v1@2757.07,671.76 cw(c2789.07,663.19) 2772.51,691.88 ; v1@2757.07,678.24 cw(c2774.74,682.97) 2758.9,692.12 ; v1@2757.5,675 cw(c2789.2,675) 2766.78,697.41 ; 2762.94,693.57 cw(c2811.26,645.24) XTAL1.4@2811.26,713.58 ; XTAL1.4@2772.44,703.07 ccw(c2737.56,737.95) XTAL1.4@2786.89,737.95 ; XTAL1.4@2780.01,710.64 cw(c2811.26,679.39) XTAL1.4@2811.26,723.58 ; XTAL1.4@2786.96,717.59 ccw(c2728.28,658.91) 2728.28,741.89 ccw(c2728.28,824.87) XTAL1.4@2786.96,766.19 ; XTAL1.4@2794.03,724.66 ccw(c2752.43,683.06) 2752.43,741.89 ccw(c2752.43,800.72) XTAL1.4@2794.03,759.12 ; XTAL1.4@2828.49,724.66 cw(c2870.09,683.06) 2870.09,741.89 cw(c2870.09,800.72) XTAL1.4@2828.49,759.12 ; XTAL1.4@2835.56,717.59 cw(c2894.24,658.91) 2894.24,741.89 cw(c2894.24,824.87) XTAL1.4@2835.56,766.19 ; XTAL1.1@2944.44,717.59 ccw(c2885.76,658.91) 2885.76,741.89 ccw(c2885.76,824.87) XTAL1.1@2944.44,766.19 ; XTAL1.1@2951.51,724.66 ccw(c2909.91,683.06) 2909.91,741.89 ccw(c2909.91,800.72) XTAL1.1@2951.51,759.12 ; v1(2955,1960) 3130,2135 v1(3130,2500) ; v1@2955,1972.5 ccw(c2955,2002.68) 2976.34,1981.34 ccw(c2997.68,1960) v1@2967.5,1960 ; XTAL1.1@2968.74,760.2 ccw(c2968.74,804.39) XTAL1.1@2999.99,773.14 ; XTAL1.1@2968.74,770.2 ccw(c2968.74,838.54) 3017.06,790.21 ; XTAL1.1@2968.74,780.2 ccw(c2968.74,872.68) 3034.13,807.28 ; XTAL1.1@2993.11,745.83 cw(c3042.44,745.83) XTAL1.1@3007.56,780.71 ; XTAL1.1@3003.11,745.83 cw(c3076.58,745.83) 3024.63,797.78 ; BT1.12@3120.41,2232.81 cw(c3097.27,2209.66) 3130,2209.66 ; BT1.12@3120.41,2287.19 ccw(c3097.27,2310.34) 3130,2310.34 ; v1@3121.16,2491.16 cw(c3099.82,2469.82) 3130,2469.82 cw(c3160.18,2469.82) v1@3138.84,2491.16 ; 3130,2211.57 cw(c3160.04,2211.57) BT1.12@3138.8,2232.81 ; 3130,2308.43 ccw(c3160.04,2308.43) BT1.12@3138.8,2287.19 ; C1.2@3134.09,794.09 ccw(c3095.68,755.68) 3095.68,810 ccw(c3095.68,864.32) C1.2@3134.09,825.91 ; C1.2@3141.16,801.16 ccw(c3119.82,779.82) 3119.82,810 ccw(c3119.82,840.18) C1.2@3141.16,818.84 ; C1.2@3150,822.5 ccw(c3150,852.68) 3171.34,831.34 ccw(c3192.68,810) C1.2@3162.5,810 ; C1.2@3150,832.5 ccw(c3150,886.82) 3188.41,848.41 ccw(c3226.82,810) C1.2@3172.5,810 ; v1@3215,852.5 ccw(c3200,841.25) 3200,860 ; v1@3215,867.5 cw(c3200,878.75) 3200,860 ; v1(3225,860) 3200,860 ; v1(3280,945) 3307.2,972.2 U2.4@3440,972.2 ; v1@3280,957.5 ccw(c3280,987.68) 3301.34,966.34 ccw(c3322.68,945) v1@3292.5,945 ; U1.8@3360.18,3249.67 ccw(c3348.56,3238.05) 3348.56,3254.49 ccw(c3348.56,3270.93) U1.8@3360.18,3259.3 ; U1.8@3360.18,3290.8 ccw(c3348.56,3302.43) 3365,3302.43 ccw(c3381.44,3302.43) U1.8@3369.82,3290.8 ; U1.8@3361.3,3291.7 ccw(c3349.83,3309.42) 3370.47,3305 ; U1.8@3361.59,3291.88 ccw(c3339.83,3329.59) 3381.88,3318.32 ; U1.8@3365,3255.32 cw(c3504.68,3255.32) C18.2@3405.91,3354.09 ; U1.8@3365,3279.47 cw(c3480.53,3279.47) C18.2@3398.84,3361.16 ; 3365,3303.61 cw(c3456.39,3303.61) C18.2@3391.77,3368.23 ; 3365,3327.75 cw(c3432.25,3327.75) C18.2@3384.7,3375.3 ; U1.8@3366.59,3283.22 ccw(c3356.9,3300.02) 3375.63,3295 ; R2.1@3367.5,2560 ccw(c3313.18,2560) 3351.59,2598.41 ccw(c3390,2636.82) R2.1@3390,2582.5 ; 3369.09,3298.56 ccw(c3380.61,3296.09) U1.8@3370.72,3289.69 ; C9.2@3374.09,2485.91 ccw(c3335.68,2524.32) 3390,2524.32 ccw(c3444.32,2524.32) C9.2@3405.91,2485.91 ; R2.1@3374.09,2544.09 cw(c3335.68,2505.68) 3390,2505.68 cw(c3444.32,2505.68) R2.1@3405.91,2544.09 ; R2.1@3377.5,2560 ccw(c3347.32,2560) 3368.66,2581.34 ccw(c3390,2602.68) R2.1@3390,2572.5 ; C9.2@3381.16,2478.84 ccw(c3359.82,2500.18) 3390,2500.18 ccw(c3420.18,2500.18) C9.2@3398.84,2478.84 ; R2.1@3381.16,2551.16 cw(c3359.82,2529.82) 3390,2529.82 cw(c3420.18,2529.82) R2.1@3398.84,2551.16 ; C18.2@3390,3370 3365,3345 U1.8@3365,3254.49 3329.49,3254.49 3320,3245 3320,2630 R2.1@3390,2560 C9.2@3390,2470 3440,2470 ; U2.4@3392.65,946.51 ccw(c3330.62,884.48) 3330.62,972.2 ccw(c3330.62,1059.93) U2.4@3392.65,997.9 ; C9.2@3399.36,2461.71 cw(c3417.78,2445.39) 3417.78,2470 cw(c3417.78,2494.61) C9.2@3399.36,2478.29 ; U2.4@3399.72,953.58 ccw(c3354.76,908.62) 3354.76,972.2 ccw(c3354.76,1035.79) U2.4@3399.72,990.83 ; C9.2@3406.84,2455.08 cw(c3440,2425.7) 3440,2470 ; C9.2@3406.84,2484.92 ccw(c3440,2514.3) 3440,2470 ; U2.4@3414.3,946.51 cw(c3352.27,884.48) 3440,884.48 cw(c3527.73,884.48) U2.4@3465.7,946.51 ; U2.4@3414.3,997.9 ccw(c3352.27,1059.93) 3440,1059.93 ccw(c3527.73,1059.93) U2.4@3465.7,997.9 ; U2.4@3421.38,953.58 cw(c3376.41,908.62) 3440,908.62 cw(c3503.59,908.62) U2.4@3458.62,953.58 ; U2.4@3421.38,990.83 ccw(c3376.41,1035.79) 3440,1035.79 ccw(c3503.59,1035.79) U2.4@3458.62,990.83 ; C8.1@3424.09,545.91 ccw(c3385.68,584.32) 3440,584.32 ccw(c3494.32,584.32) C8.1@3455.91,545.91 ; U2.2@3431.01,715.18 cw(c3409.3,693.47) 3440,693.47 cw(c3470.7,693.47) U2.2@3448.99,715.18 ; U2.2@3431.01,780.41 ccw(c3409.3,802.12) 3440,802.12 ccw(c3470.7,802.12) U2.2@3448.99,780.41 ; C8.1@3431.16,538.84 ccw(c3409.82,560.18) 3440,560.18 ccw(c3470.18,560.18) C8.1@3448.84,538.84 ; C8.1@3440,530 U2.2@3440,747.8 U2.4@3440,972.2 ; v1@3451.16,2521.16 cw(c3429.82,2499.82) 3460,2499.82 cw(c3490.18,2499.82) v1@3468.84,2521.16 ; v1@3457.88,2542.32 ccw(c3456.16,2552.35) 3465.99,2549.71 ccw(c3476.95,2546.78) R1.1@3468.89,2538.79 ; 3460,2498.35 cw(c3513.46,2498.35) R1.1@3494.45,2548.32 ; v1@3460,2512.86 cw(c3507.94,2512.86) R1.1@3490.89,2557.66 ; v1@3460,2527.36 cw(c3502.42,2527.36) R1.1@3487.33,2567.01 ; v1(3460,2530) 3460,2490 3440,2470 ; v1@3460.79,2532.37 ccw(c3466.96,2550.91) R1.1@3479.42,2535.87 ; R1.1@3463.95,2541.86 ccw(c3473.66,2571.06) R1.1@3493.3,2547.37 ; XTAL1.4@2811.26,741.89 XTAL1.1@2968.74,741.89 3036.85,810 C1.2@3150,810 3200,860
  Bottom Layer w10: v1(2140,1900) v1(2390,1900) ; v1@2148.84,1891.16 cw(c2170.18,1869.82) 2170.18,1900 cw(c2170.18,1930.18) v1@2148.84,1908.84 ; v1(2160,1600) 2300,1600 v1(2370,1670) ; v1@2168.84,1591.16 cw(c2190.18,1569.82) 2190.18,1600 cw(c2190.18,1630.18) v1@2168.84,1608.84 ; v2@2355,738 cw(c2355,721.1) 2366.95,733.05 cw(c2378.9,745) v2@2362,745 ; v2(2355,745) 2425,675 v1(2615,675) v1(2745,675) ; v1@2357.5,1670 cw(c2327.32,1670) 2348.66,1648.66 cw(c2370,1627.32) v1@2370,1657.5 ; v2(2370,970) v2(2545,970) 2645,970 2690,925 v1(2690,840) ; v1(2370,1830) 2390,1850 ; v1@2370.59,1842.49 ccw(c2371.79,1868.21) 2390,1850 ; v2@2374.95,965.05 cw(c2386.9,953.1) 2386.9,970 cw(c2386.9,986.9) v2@2374.95,974.95 ; v1@2381.16,1908.84 cw(c2359.82,1930.18) 2359.82,1900 cw(c2359.82,1869.82) 2381.16,1891.16 cw(c2359.82,1869.82) 2390,1869.82 cw(c2420.18,1869.82) 2398.84,1891.16 cw(c2420.18,1869.82) 2420.18,1900 cw(c2420.18,1930.18) v1@2398.84,1908.84 ; v1@2382.49,1830.59 cw(c2408.21,1831.79) 2390,1850 ; v1@2451.16,1891.16 ccw(c2429.82,1869.82) 2429.82,1900 ccw(c2429.82,1930.18) v1@2451.16,1908.84 ; v1@2468.84,1891.16 cw(c2490.18,1869.82) 2490.18,1900 cw(c2490.18,1930.18) v1@2468.84,1908.84 ; v2@2540.05,965.05 ccw(c2528.1,953.1) 2528.1,970 ccw(c2528.1,986.9) v2@2540.05,974.95 ; v2@2549.95,965.05 cw(c2561.9,953.1) 2561.9,970 cw(c2561.9,986.9) v2@2549.95,974.95 ; v1@2606.16,666.16 ccw(c2584.82,644.82) 2584.82,675 ccw(c2584.82,705.18) v1@2606.16,683.84 ; v1@2623.84,666.16 cw(c2645.18,644.82) 2645.18,675 cw(c2645.18,705.18) v1@2623.84,683.84 ; v1@2681.16,848.84 ccw(c2659.82,870.18) 2690,870.18 ccw(c2720.18,870.18) v1@2698.84,848.84 ; v1@2736.16,666.16 ccw(c2714.82,644.82) 2714.82,675 ccw(c2714.82,705.18) v1@2736.16,683.84 ; v1@2942.5,1960 cw(c2912.32,1960) 2933.66,1938.66 cw(c2955,1917.32) v1@2955,1947.5 ; v1(2955,1960) 2895,1900 v1(2460,1900) v1(2390,1900) ; v1(3130,2500) 3430,2500 v1(3460,2530) ; v1@3138.84,2491.16 cw(c3160.18,2469.82) 3160.18,2500 cw(c3160.18,2530.18) v1@3138.84,2508.84 ; v1(3225,860) 3260,860 3280,880 v1(3280,945) ; v1@3233.84,851.16 cw(c3255.18,829.82) 3255.18,860 cw(c3255.18,890.18) v1@3233.84,868.84 ; v1@3271.16,936.16 cw(c3249.82,914.82) 3280,914.82 cw(c3310.18,914.82) v1@3288.84,936.16 ; v1@3447.5,2530 cw(c3417.32,2530) 3438.66,2508.66 cw(c3460,2487.32) v1@3460,2517.5 ; 2390,1850 v1(2390,1900)
8MCLK_OSC: MCU1.5 U3.5 XTAL1.3 | length 1747.7
  Top Layer w10: MCU1.5@2466.26,1030 2466.26,1096.26 2480,1110 2560,1110 v1(2650,1200) 2770,1200 2811.26,1158.74 XTAL1.3@2811.26,978.11 ; v1@2491.16,1308.84 ccw(c2469.82,1330.18) 2500,1330.18 ccw(c2530.18,1330.18) v1@2508.84,1308.84 ; v1(2500,1300) 2500,1560 2470,1590 2470,1680 2481.1,1691.1 U3.5@2517.52,1691.1 ; v1@2637.5,1200 cw(c2607.32,1200) 2628.66,1178.66 cw(c2650,1157.32) v1@2650,1187.5 ; v1@2658.84,1191.16 cw(c2680.18,1169.82) 2680.18,1200 cw(c2680.18,1230.18) v1@2658.84,1208.84 ; XTAL1.3@2786.96,1006.35 ccw(c2728.28,1065.02) 2811.26,1065.02 ccw(c2894.24,1065.02) XTAL1.3@2835.56,1006.35 ; XTAL1.3@2794.03,999.28 ccw(c2752.43,1040.88) 2811.26,1040.88 ccw(c2870.09,1040.88) XTAL1.3@2828.49,999.28
  Bottom Layer w10: v1@2500,1287.5 cw(c2500,1257.32) 2521.34,1278.66 cw(c2542.68,1300) v1@2512.5,1300 ; v1(2500,1300) 2540,1260 2590,1260 v1(2650,1200) ; v1@2637.5,1200 ccw(c2607.32,1200) 2628.66,1221.34 ccw(c2650,1242.68) v1@2650,1212.5
B1: LED1.1 LED2.3 LED3.1 LED4.3 LED5.1 LED6.3 LED7.1 LED8.3 LED9.1 LED10.3 LED11.1 LED12.3 R11.1 | length 5745.2
  Top Layer w10: v1@458.23,3647.63 cw(c453.96,3617.75) 478.11,3635.86 cw(c502.25,3653.96) v1@472.37,3658.23 ; v1(460,3660) 490,3620 R11.1@550,3600 ; R11.1@529.88,3589.94 ccw(c481.29,3565.65) 498.47,3617.18 ccw(c515.65,3668.71) R11.1@539.94,3620.12 ; R11.1@538.82,3594.41 ccw(c511.83,3580.91) 521.37,3609.54 ccw(c530.91,3638.17) R11.1@544.41,3611.18
  Bottom Layer w10: LED12.3@447.63,3783.55 cw(c417.75,3753.68) 460,3753.68 cw(c502.25,3753.68) LED12.3@472.37,3783.55 ; v1@451.16,3668.84 ccw(c429.82,3690.18) 460,3690.18 ccw(c490.18,3690.18) v1@468.84,3668.84 ; v1(460,3660) LED12.3@460,3798.43 LED11.1@640,3798.43 640,3789.71 691.29,3738.43 1008.71,3738.43 1060,3789.71 LED10.3@1060,3798.43 LED9.1@1240,3798.43 1240,3789.71 1291.29,3738.43 1608.71,3738.43 1660,3789.71 LED8.3@1660,3798.43 LED7.1@1840,3798.43 1840,3789.71 1891.29,3738.43 2208.71,3738.43 2260,3789.71 LED6.3@2260,3798.43 LED5.1@2440,3798.43 2440,3789.71 2491.29,3738.43 2808.71,3738.43 2860,3789.71 LED4.3@2860,3798.43 LED3.1@3040,3798.43 3040,3789.71 3091.29,3738.43 3408.71,3738.43 3460,3789.71 LED2.3@3460,3798.43 LED1.1@3640,3798.43 ; LED12.3@472.37,3786.05 cw(c502.25,3756.18) 502.25,3798.43 cw(c502.25,3840.67) LED12.3@472.37,3810.8 ; LED11.1@627.63,3786.05 ccw(c597.75,3756.18) 597.75,3798.43 ccw(c597.75,3840.67) LED11.1@627.63,3810.8 ; LED11.1@640,3778.43 cw(c640,3751.18) 659.27,3770.44 ; LED11.1@647.5,3795.93 ccw(c680.61,3795.93) 657.2,3772.52 ; LED11.1@657.5,3795.93 ccw(c714.75,3795.93) 674.27,3755.44 ; 1025.73,3755.44 ccw(c985.25,3795.93) LED10.3@1042.5,3795.93 ; 1040.73,3770.44 cw(c1060,3751.18) LED10.3@1060,3778.43 ; 1042.8,3772.52 ccw(c1019.39,3795.93) LED10.3@1052.5,3795.93 ; LED10.3@1072.37,3786.05 cw(c1102.25,3756.18) 1102.25,3798.43 cw(c1102.25,3840.67) LED10.3@1072.37,3810.8 ; LED9.1@1227.63,3786.05 ccw(c1197.75,3756.18) 1197.75,3798.43 ccw(c1197.75,3840.67) LED9.1@1227.63,3810.8 ; LED9.1@1240,3778.43 cw(c1240,3751.18) 1259.27,3770.44 ; LED9.1@1247.5,3795.93 ccw(c1280.61,3795.93) 1257.2,3772.52 ; LED9.1@1257.5,3795.93 ccw(c1314.75,3795.93) 1274.27,3755.44 ; 1625.73,3755.44 ccw(c1585.25,3795.93) LED8.3@1642.5,3795.93 ; 1640.73,3770.44 cw(c1660,3751.18) LED8.3@1660,3778.43 ; 1642.8,3772.52 ccw(c1619.39,3795.93) LED8.3@1652.5,3795.93 ; LED8.3@1672.37,3786.05 cw(c1702.25,3756.18) 1702.25,3798.43 cw(c1702.25,3840.67) LED8.3@1672.37,3810.8 ; LED7.1@1827.63,3786.05 ccw(c1797.75,3756.18) 1797.75,3798.43 ccw(c1797.75,3840.67) LED7.1@1827.63,3810.8 ; LED7.1@1840,3778.43 cw(c1840,3751.18) 1859.27,3770.44 ; LED7.1@1847.5,3795.93 ccw(c1880.61,3795.93) 1857.2,3772.52 ; LED7.1@1857.5,3795.93 ccw(c1914.75,3795.93) 1874.27,3755.44 ; 2225.73,3755.44 ccw(c2185.25,3795.93) LED6.3@2242.5,3795.93 ; 2240.73,3770.44 cw(c2260,3751.18) LED6.3@2260,3778.43 ; 2242.8,3772.52 ccw(c2219.39,3795.93) LED6.3@2252.5,3795.93 ; LED6.3@2272.37,3786.05 cw(c2302.25,3756.18) 2302.25,3798.43 cw(c2302.25,3840.67) LED6.3@2272.37,3810.8 ; LED5.1@2427.63,3786.05 ccw(c2397.75,3756.18) 2397.75,3798.43 ccw(c2397.75,3840.67) LED5.1@2427.63,3810.8 ; LED5.1@2440,3778.43 cw(c2440,3751.18) 2459.27,3770.44 ; LED5.1@2447.5,3795.93 ccw(c2480.61,3795.93) 2457.2,3772.52 ; LED5.1@2457.5,3795.93 ccw(c2514.75,3795.93) 2474.27,3755.44 ; 2825.73,3755.44 ccw(c2785.25,3795.93) LED4.3@2842.5,3795.93 ; 2840.73,3770.44 cw(c2860,3751.18) LED4.3@2860,3778.43 ; 2842.8,3772.52 ccw(c2819.39,3795.93) LED4.3@2852.5,3795.93 ; LED4.3@2872.37,3786.05 cw(c2902.25,3756.18) 2902.25,3798.43 cw(c2902.25,3840.67) LED4.3@2872.37,3810.8 ; LED3.1@3027.63,3786.05 ccw(c2997.75,3756.18) 2997.75,3798.43 ccw(c2997.75,3840.67) LED3.1@3027.63,3810.8 ; LED3.1@3040,3778.43 cw(c3040,3751.18) 3059.27,3770.44 ; LED3.1@3047.5,3795.93 ccw(c3080.61,3795.93) 3057.2,3772.52 ; LED3.1@3057.5,3795.93 ccw(c3114.75,3795.93) 3074.27,3755.44 ; 3425.73,3755.44 ccw(c3385.25,3795.93) LED2.3@3442.5,3795.93 ; 3440.73,3770.44 cw(c3460,3751.18) LED2.3@3460,3778.43 ; 3442.8,3772.52 ccw(c3419.39,3795.93) LED2.3@3452.5,3795.93 ; LED2.3@3472.37,3786.05 cw(c3502.25,3756.18) 3502.25,3798.43 cw(c3502.25,3840.67) LED2.3@3472.37,3810.8 ; LED1.1@3627.63,3786.05 ccw(c3597.75,3756.18) 3597.75,3798.43 ccw(c3597.75,3840.67) LED1.1@3627.63,3810.8
B2: LED13.1 LED14.3 LED15.1 LED16.3 LED17.1 LED18.3 LED19.1 LED20.3 LED21.1 LED22.3 LED23.1 LED24.3 R15.1 | length 5745.2
  Top Layer w10: v1@458.23,3347.63 cw(c453.96,3317.75) 478.11,3335.86 cw(c502.25,3353.96) v1@472.37,3358.23 ; v1(460,3360) 490,3320 R15.1@550,3300 ; R15.1@529.88,3289.94 ccw(c481.29,3265.65) 498.47,3317.18 ccw(c515.65,3368.71) R15.1@539.94,3320.12 ; R15.1@538.82,3294.41 ccw(c511.83,3280.91) 521.37,3309.54 ccw(c530.91,3338.17) R15.1@544.41,3311.18
  Bottom Layer w10: LED24.3@447.63,3483.55 cw(c417.75,3453.68) 460,3453.68 cw(c502.25,3453.68) LED24.3@472.37,3483.55 ; v1@451.16,3368.84 ccw(c429.82,3390.18) 460,3390.18 ccw(c490.18,3390.18) v1@468.84,3368.84 ; v1(460,3360) LED24.3@460,3498.43 LED23.1@640,3498.43 640,3489.71 691.29,3438.43 1008.71,3438.43 1060,3489.71 LED22.3@1060,3498.43 LED21.1@1240,3498.43 1240,3489.71 1291.29,3438.43 1608.71,3438.43 1660,3489.71 LED20.3@1660,3498.43 LED19.1@1840,3498.43 1840,3489.71 1891.29,3438.43 2208.71,3438.43 2260,3489.71 LED18.3@2260,3498.43 LED17.1@2440,3498.43 2440,3489.71 2491.29,3438.43 2808.71,3438.43 2860,3489.71 LED16.3@2860,3498.43 LED15.1@3040,3498.43 3040,3489.71 3091.29,3438.43 3408.71,3438.43 3460,3489.71 LED14.3@3460,3498.43 LED13.1@3640,3498.43 ; LED24.3@472.37,3486.05 cw(c502.25,3456.18) 502.25,3498.43 cw(c502.25,3540.67) LED24.3@472.37,3510.8 ; LED23.1@627.63,3486.05 ccw(c597.75,3456.18) 597.75,3498.43 ccw(c597.75,3540.67) LED23.1@627.63,3510.8 ; LED23.1@640,3478.43 cw(c640,3451.18) 659.27,3470.44 ; LED23.1@647.5,3495.93 ccw(c680.61,3495.93) 657.2,3472.52 ; LED23.1@657.5,3495.93 ccw(c714.75,3495.93) 674.27,3455.44 ; 1025.73,3455.44 ccw(c985.25,3495.93) LED22.3@1042.5,3495.93 ; 1040.73,3470.44 cw(c1060,3451.18) LED22.3@1060,3478.43 ; 1042.8,3472.52 ccw(c1019.39,3495.93) LED22.3@1052.5,3495.93 ; LED22.3@1072.37,3486.05 cw(c1102.25,3456.18) 1102.25,3498.43 cw(c1102.25,3540.67) LED22.3@1072.37,3510.8 ; LED21.1@1227.63,3486.05 ccw(c1197.75,3456.18) 1197.75,3498.43 ccw(c1197.75,3540.67) LED21.1@1227.63,3510.8 ; LED21.1@1240,3478.43 cw(c1240,3451.18) 1259.27,3470.44 ; LED21.1@1247.5,3495.93 ccw(c1280.61,3495.93) 1257.2,3472.52 ; LED21.1@1257.5,3495.93 ccw(c1314.75,3495.93) 1274.27,3455.44 ; 1625.73,3455.44 ccw(c1585.25,3495.93) LED20.3@1642.5,3495.93 ; 1640.73,3470.44 cw(c1660,3451.18) LED20.3@1660,3478.43 ; 1642.8,3472.52 ccw(c1619.39,3495.93) LED20.3@1652.5,3495.93 ; LED20.3@1672.37,3486.05 cw(c1702.25,3456.18) 1702.25,3498.43 cw(c1702.25,3540.67) LED20.3@1672.37,3510.8 ; LED19.1@1827.63,3486.05 ccw(c1797.75,3456.18) 1797.75,3498.43 ccw(c1797.75,3540.67) LED19.1@1827.63,3510.8 ; LED19.1@1840,3478.43 cw(c1840,3451.18) 1859.27,3470.44 ; LED19.1@1847.5,3495.93 ccw(c1880.61,3495.93) 1857.2,3472.52 ; LED19.1@1857.5,3495.93 ccw(c1914.75,3495.93) 1874.27,3455.44 ; 2225.73,3455.44 ccw(c2185.25,3495.93) LED18.3@2242.5,3495.93 ; 2240.73,3470.44 cw(c2260,3451.18) LED18.3@2260,3478.43 ; 2242.8,3472.52 ccw(c2219.39,3495.93) LED18.3@2252.5,3495.93 ; LED18.3@2272.37,3486.05 cw(c2302.25,3456.18) 2302.25,3498.43 cw(c2302.25,3540.67) LED18.3@2272.37,3510.8 ; LED17.1@2427.63,3486.05 ccw(c2397.75,3456.18) 2397.75,3498.43 ccw(c2397.75,3540.67) LED17.1@2427.63,3510.8 ; LED17.1@2440,3478.43 cw(c2440,3451.18) 2459.27,3470.44 ; LED17.1@2447.5,3495.93 ccw(c2480.61,3495.93) 2457.2,3472.52 ; LED17.1@2457.5,3495.93 ccw(c2514.75,3495.93) 2474.27,3455.44 ; 2825.73,3455.44 ccw(c2785.25,3495.93) LED16.3@2842.5,3495.93 ; 2840.73,3470.44 cw(c2860,3451.18) LED16.3@2860,3478.43 ; 2842.8,3472.52 ccw(c2819.39,3495.93) LED16.3@2852.5,3495.93 ; LED16.3@2872.37,3486.05 cw(c2902.25,3456.18) 2902.25,3498.43 cw(c2902.25,3540.67) LED16.3@2872.37,3510.8 ; LED15.1@3027.63,3486.05 ccw(c2997.75,3456.18) 2997.75,3498.43 ccw(c2997.75,3540.67) LED15.1@3027.63,3510.8 ; LED15.1@3040,3478.43 cw(c3040,3451.18) 3059.27,3470.44 ; LED15.1@3047.5,3495.93 ccw(c3080.61,3495.93) 3057.2,3472.52 ; LED15.1@3057.5,3495.93 ccw(c3114.75,3495.93) 3074.27,3455.44 ; 3425.73,3455.44 ccw(c3385.25,3495.93) LED14.3@3442.5,3495.93 ; 3440.73,3470.44 cw(c3460,3451.18) LED14.3@3460,3478.43 ; 3442.8,3472.52 ccw(c3419.39,3495.93) LED14.3@3452.5,3495.93 ; LED14.3@3472.37,3486.05 cw(c3502.25,3456.18) 3502.25,3498.43 cw(c3502.25,3540.67) LED14.3@3472.37,3510.8 ; LED13.1@3627.63,3486.05 ccw(c3597.75,3456.18) 3597.75,3498.43 ccw(c3597.75,3540.67) LED13.1@3627.63,3510.8
B3: LED25.1 LED26.3 LED27.1 LED28.3 LED29.1 LED30.3 LED31.1 LED32.3 LED33.1 LED34.3 LED35.1 LED36.3 R20.2 | length 5928.9
  Top Layer w10: v1@458.23,3047.63 cw(c453.96,3017.75) 478.11,3035.86 cw(c502.25,3053.96) v1@472.37,3058.23 ; v1(460,3060) 490,3020 R20.2@550,3000 ; R20.2@529.88,2989.94 ccw(c481.29,2965.65) 498.47,3017.18 ccw(c515.65,3068.71) R20.2@539.94,3020.12 ; R20.2@538.82,2994.41 ccw(c511.83,2980.91) 521.37,3009.54 ccw(c530.91,3038.17) R20.2@544.41,3011.18
  Bottom Layer w10: LED36.3@447.63,3183.55 cw(c417.75,3153.68) 460,3153.68 cw(c502.25,3153.68) LED36.3@472.37,3183.55 ; v1@451.16,3068.84 ccw(c429.82,3090.18) 460,3090.18 ccw(c490.18,3090.18) v1@468.84,3068.84 ; v1(460,3060) LED36.3@460,3198.43 LED35.1@640,3198.43 640,3189.71 691.29,3138.43 1008.71,3138.43 1060,3189.71 LED34.3@1060,3198.43 LED33.1@1240,3198.43 1240,3189.71 1291.29,3138.43 1608.71,3138.43 1660,3189.71 1660,3213.43 1840,3213.43 1840,3189.71 1891.29,3138.43 2208.71,3138.43 2260,3189.71 LED30.3@2260,3198.43 LED29.1@2440,3198.43 2440,3189.71 2491.29,3138.43 2808.71,3138.43 2860,3189.71 LED28.3@2860,3198.43 LED27.1@3040,3198.43 3040,3189.71 3091.29,3138.43 3408.71,3138.43 3460,3189.71 LED26.3@3460,3198.43 LED25.1@3640,3198.43 ; LED36.3@472.37,3186.05 cw(c502.25,3156.18) 502.25,3198.43 cw(c502.25,3240.67) LED36.3@472.37,3210.8 ; LED35.1@627.63,3186.05 ccw(c597.75,3156.18) 597.75,3198.43 ccw(c597.75,3240.67) LED35.1@627.63,3210.8 ; LED35.1@640,3178.43 cw(c640,3151.18) 659.27,3170.44 ; LED35.1@647.5,3195.93 ccw(c680.61,3195.93) 657.2,3172.52 ; LED35.1@657.5,3195.93 ccw(c714.75,3195.93) 674.27,3155.44 ; 1025.73,3155.44 ccw(c985.25,3195.93) LED34.3@1042.5,3195.93 ; 1040.73,3170.44 cw(c1060,3151.18) LED34.3@1060,3178.43 ; 1042.8,3172.52 ccw(c1019.39,3195.93) LED34.3@1052.5,3195.93 ; LED34.3@1072.37,3186.05 cw(c1102.25,3156.18) 1102.25,3198.43 cw(c1102.25,3240.67) LED34.3@1072.37,3210.8 ; LED33.1@1227.63,3186.05 ccw(c1197.75,3156.18) 1197.75,3198.43 ccw(c1197.75,3240.67) LED33.1@1227.63,3210.8 ; LED33.1@1240,3178.43 cw(c1240,3151.18) 1259.27,3170.44 ; LED33.1@1247.5,3195.93 ccw(c1280.61,3195.93) 1257.2,3172.52 ; LED33.1@1257.5,3195.93 ccw(c1314.75,3195.93) 1274.27,3155.44 ; 1625.73,3155.44 ccw(c1585.25,3195.93) LED32.3@1642.5,3195.93 ; 1640.73,3170.44 cw(c1660,3151.18) LED32.3@1660,3178.43 ; 1642.8,3172.52 ccw(c1619.39,3195.93) LED32.3@1652.5,3195.93 ; LED32.3@1658.23,3202.69 cw(c1684.14,3176.78) 1684.14,3213.43 ; LED32.3@1665.3,3195.62 cw(c1708.28,3152.64) 1708.28,3213.43 ; LED32.3@1672.37,3188.55 cw(c1732.43,3128.5) 1732.43,3213.43 ; 1767.57,3213.43 cw(c1767.57,3128.5) LED31.1@1827.63,3188.55 ; 1791.72,3213.43 cw(c1791.72,3152.64) LED31.1@1834.7,3195.62 ; 1815.86,3213.43 cw(c1815.86,3176.78) LED31.1@1841.77,3202.69 ; LED31.1@1840,3178.43 cw(c1840,3151.18) 1859.27,3170.44 ; LED31.1@1847.5,3195.93 ccw(c1880.61,3195.93) 1857.2,3172.52 ; LED31.1@1857.5,3195.93 ccw(c1914.75,3195.93) 1874.27,3155.44 ; 2225.73,3155.44 ccw(c2185.25,3195.93) LED30.3@2242.5,3195.93 ; 2240.73,3170.44 cw(c2260,3151.18) LED30.3@2260,3178.43 ; 2242.8,3172.52 ccw(c2219.39,3195.93) LED30.3@2252.5,3195.93 ; LED30.3@2272.37,3186.05 cw(c2302.25,3156.18) 2302.25,3198.43 cw(c2302.25,3240.67) LED30.3@2272.37,3210.8 ; LED29.1@2427.63,3186.05 ccw(c2397.75,3156.18) 2397.75,3198.43 ccw(c2397.75,3240.67) LED29.1@2427.63,3210.8 ; LED29.1@2440,3178.43 cw(c2440,3151.18) 2459.27,3170.44 ; LED29.1@2447.5,3195.93 ccw(c2480.61,3195.93) 2457.2,3172.52 ; LED29.1@2457.5,3195.93 ccw(c2514.75,3195.93) 2474.27,3155.44 ; 2825.73,3155.44 ccw(c2785.25,3195.93) LED28.3@2842.5,3195.93 ; 2840.73,3170.44 cw(c2860,3151.18) LED28.3@2860,3178.43 ; 2842.8,3172.52 ccw(c2819.39,3195.93) LED28.3@2852.5,3195.93 ; LED28.3@2872.37,3186.05 cw(c2902.25,3156.18) 2902.25,3198.43 cw(c2902.25,3240.67) LED28.3@2872.37,3210.8 ; LED27.1@3027.63,3186.05 ccw(c2997.75,3156.18) 2997.75,3198.43 ccw(c2997.75,3240.67) LED27.1@3027.63,3210.8 ; LED27.1@3040,3178.43 cw(c3040,3151.18) 3059.27,3170.44 ; LED27.1@3047.5,3195.93 ccw(c3080.61,3195.93) 3057.2,3172.52 ; LED27.1@3057.5,3195.93 ccw(c3114.75,3195.93) 3074.27,3155.44 ; 3425.73,3155.44 ccw(c3385.25,3195.93) LED26.3@3442.5,3195.93 ; 3440.73,3170.44 cw(c3460,3151.18) LED26.3@3460,3178.43 ; 3442.8,3172.52 ccw(c3419.39,3195.93) LED26.3@3452.5,3195.93 ; LED26.3@3472.37,3186.05 cw(c3502.25,3156.18) 3502.25,3198.43 cw(c3502.25,3240.67) LED26.3@3472.37,3210.8 ; LED25.1@3627.63,3186.05 ccw(c3597.75,3156.18) 3597.75,3198.43 ccw(c3597.75,3240.67) LED25.1@3627.63,3210.8
B4: LED37.1 LED38.3 LED39.1 LED40.3 LED41.1 LED42.3 LED43.1 LED44.3 LED45.1 LED46.3 LED47.1 LED48.3 R21.1 | length 5768.7
  Top Layer w10: v1@458.23,2747.63 cw(c453.96,2717.75) 478.11,2735.86 cw(c502.25,2753.96) v1@472.37,2758.23 ; v1(460,2760) 490,2720 R21.1@550,2700 ; R21.1@529.88,2689.94 ccw(c481.29,2665.65) 498.47,2717.18 ccw(c515.65,2768.71) R21.1@539.94,2720.12 ; R21.1@538.82,2694.41 ccw(c511.83,2680.91) 521.37,2709.54 ccw(c530.91,2738.17) R21.1@544.41,2711.18
  Bottom Layer w10: LED48.3@447.63,2883.55 cw(c417.75,2853.68) 460,2853.68 cw(c502.25,2853.68) LED48.3@472.37,2883.55 ; v1@451.16,2768.84 ccw(c429.82,2790.18) 460,2790.18 ccw(c490.18,2790.18) v1@468.84,2768.84 ; v1(460,2760) LED48.3@460,2898.43 LED47.1@640,2898.43 640,2889.71 691.29,2838.43 1008.71,2838.43 1060,2889.71 LED46.3@1060,2898.43 LED45.1@1240,2898.43 1240,2889.71 1291.29,2838.43 1608.71,2838.43 1660,2889.71 LED44.3@1660,2898.43 LED43.1@1840,2898.43 1840,2889.71 1919.71,2810 2180.29,2810 2260,2889.71 LED42.3@2260,2898.43 LED41.1@2440,2898.43 2440,2889.71 2491.29,2838.43 2808.71,2838.43 2860,2889.71 LED40.3@2860,2898.43 LED39.1@3040,2898.43 3040,2889.71 3091.29,2838.43 3408.71,2838.43 3460,2889.71 LED38.3@3460,2898.43 LED37.1@3640,2898.43 ; LED48.3@472.37,2886.05 cw(c502.25,2856.18) 502.25,2898.43 cw(c502.25,2940.67) LED48.3@472.37,2910.8 ; LED47.1@627.63,2886.05 ccw(c597.75,2856.18) 597.75,2898.43 ccw(c597.75,2940.67) LED47.1@627.63,2910.8 ; LED47.1@640,2878.43 cw(c640,2851.18) 659.27,2870.44 ; LED47.1@647.5,2895.93 ccw(c680.61,2895.93) 657.2,2872.52 ; LED47.1@657.5,2895.93 ccw(c714.75,2895.93) 674.27,2855.44 ; 1025.73,2855.44 ccw(c985.25,2895.93) LED46.3@1042.5,2895.93 ; 1040.73,2870.44 cw(c1060,2851.18) LED46.3@1060,2878.43 ; 1042.8,2872.52 ccw(c1019.39,2895.93) LED46.3@1052.5,2895.93 ; LED46.3@1072.37,2886.05 cw(c1102.25,2856.18) 1102.25,2898.43 cw(c1102.25,2940.67) LED46.3@1072.37,2910.8 ; LED45.1@1227.63,2886.05 ccw(c1197.75,2856.18) 1197.75,2898.43 ccw(c1197.75,2940.67) LED45.1@1227.63,2910.8 ; LED45.1@1240,2878.43 cw(c1240,2851.18) 1259.27,2870.44 ; LED45.1@1247.5,2895.93 ccw(c1280.61,2895.93) 1257.2,2872.52 ; LED45.1@1257.5,2895.93 ccw(c1314.75,2895.93) 1274.27,2855.44 ; 1625.73,2855.44 ccw(c1585.25,2895.93) LED44.3@1642.5,2895.93 ; 1640.73,2870.44 cw(c1660,2851.18) LED44.3@1660,2878.43 ; 1642.8,2872.52 ccw(c1619.39,2895.93) LED44.3@1652.5,2895.93 ; LED44.3@1672.37,2886.05 cw(c1702.25,2856.18) 1702.25,2898.43 cw(c1702.25,2940.67) LED44.3@1672.37,2910.8 ; LED43.1@1827.63,2886.05 ccw(c1797.75,2856.18) 1797.75,2898.43 ccw(c1797.75,2940.67) LED43.1@1827.63,2910.8 ; LED43.1@1840,2878.43 cw(c1840,2851.18) 1859.27,2870.44 ; LED43.1@1847.5,2895.93 ccw(c1880.61,2895.93) 1857.2,2872.52 ; LED43.1@1857.5,2895.93 ccw(c1914.75,2895.93) 1874.27,2855.44 ; 2225.73,2855.44 ccw(c2185.25,2895.93) LED42.3@2242.5,2895.93 ; 2240.73,2870.44 cw(c2260,2851.18) LED42.3@2260,2878.43 ; 2242.8,2872.52 ccw(c2219.39,2895.93) LED42.3@2252.5,2895.93 ; LED42.3@2272.37,2886.05 cw(c2302.25,2856.18) 2302.25,2898.43 cw(c2302.25,2940.67) LED42.3@2272.37,2910.8 ; LED41.1@2427.63,2886.05 ccw(c2397.75,2856.18) 2397.75,2898.43 ccw(c2397.75,2940.67) LED41.1@2427.63,2910.8 ; LED41.1@2440,2878.43 cw(c2440,2851.18) 2459.27,2870.44 ; LED41.1@2447.5,2895.93 ccw(c2480.61,2895.93) 2457.2,2872.52 ; LED41.1@2457.5,2895.93 ccw(c2514.75,2895.93) 2474.27,2855.44 ; 2825.73,2855.44 ccw(c2785.25,2895.93) LED40.3@2842.5,2895.93 ; 2840.73,2870.44 cw(c2860,2851.18) LED40.3@2860,2878.43 ; 2842.8,2872.52 ccw(c2819.39,2895.93) LED40.3@2852.5,2895.93 ; LED40.3@2872.37,2886.05 cw(c2902.25,2856.18) 2902.25,2898.43 cw(c2902.25,2940.67) LED40.3@2872.37,2910.8 ; LED39.1@3027.63,2886.05 ccw(c2997.75,2856.18) 2997.75,2898.43 ccw(c2997.75,2940.67) LED39.1@3027.63,2910.8 ; LED39.1@3040,2878.43 cw(c3040,2851.18) 3059.27,2870.44 ; LED39.1@3047.5,2895.93 ccw(c3080.61,2895.93) 3057.2,2872.52 ; LED39.1@3057.5,2895.93 ccw(c3114.75,2895.93) 3074.27,2855.44 ; 3425.73,2855.44 ccw(c3385.25,2895.93) LED38.3@3442.5,2895.93 ; 3440.73,2870.44 cw(c3460,2851.18) LED38.3@3460,2878.43 ; 3442.8,2872.52 ccw(c3419.39,2895.93) LED38.3@3452.5,2895.93 ; LED38.3@3472.37,2886.05 cw(c3502.25,2856.18) 3502.25,2898.43 cw(c3502.25,2940.67) LED38.3@3472.37,2910.8 ; LED37.1@3627.63,2886.05 ccw(c3597.75,2856.18) 3597.75,2898.43 ccw(c3597.75,2940.67) LED37.1@3627.63,2910.8